# EAGLE board Soleful (EAGLE 7.7.0)

Size 100 x 80 mm. Coordinates in mm from the lower left corner, seen from the top.
Outline: 0,0 100,0 100,80 0,80 0,0
Copper layers (1*16): Top 0.035mm / dielectric 1.5mm / Bottom 0.035mm
Design rules "default": minimum track width 10mil, minimum drill 24mil, track to track 8mil, track to pad 8mil, pad to pad 8mil, via to via 8mil, smd to smd 8mil, copper to edge 40mil, drill to drill 8mil, minimum pad ring 10mil, minimum via ring 8mil, stop-mask expansion 4mil, vias tented up to drill 0mil, thermal gap 10mil

## Footprints (pad centres in the part's own frame; a part is rotated, then mirrored left to right if it is on the bottom)
0603 = smd 1.1 x 1: 1 -0.85,0; 2 0.85,0
0402-CAP = smd 0.7 x 0.9: 1 -0.65,0; 2 0.65,0
0805-NO = smd 1.3 x 1.5: 1 -0.95,0; 2 0.95,0
0805_10MGAP = smd 1.2 x 1.5: 1 -1.05,0; 2 1.05,0
LED-0603 = smd 1 x 1: A -0.877,0; C 0.877,0
LQFP64 = smd 0.24 x 1.2: 1 -3.75,-6; 2 -3.25,-6; 3 -2.75,-6; 4 -2.25,-6; 5 -1.75,-6; 6 -1.25,-6; 7 -0.75,-6; 8 -0.25,-6; 9 0.25,-6; 10 0.75,-6; 11 1.25,-6; 12 1.75,-6; 13 2.25,-6; 14 2.75,-6; 15 3.25,-6; 16 3.75,-6; 33 3.75,6; 34 3.25,6; 35 2.75,6; 36 2.25,6; 37 1.75,6; 38 1.25,6; 39 0.75,6; 40 0.25,6; 41 -0.25,6; 42 -0.75,6; 43 -1.25,6; 44 -1.75,6; 45 -2.25,6; 46 -2.75,6; 47 -3.25,6; 48 -3.75,6 | smd 1.2 x 0.24: 17 6,-3.75; 18 6,-3.25; 19 6,-2.75; 20 6,-2.25; 21 6,-1.75; 22 6,-1.25; 23 6,-0.75; 24 6,-0.25; 25 6,0.25; 26 6,0.75; 27 6,1.25; 28 6,1.75; 29 6,2.25; 30 6,2.75; 31 6,3.25; 32 6,3.75; 49 -6,3.75; 50 -6,3.25; 51 -6,2.75; 52 -6,2.25; 53 -6,1.75; 54 -6,1.25; 55 -6,0.75; 56 -6,0.25; 57 -6,-0.25; 58 -6,-0.75; 59 -6,-1.25; 60 -6,-1.75; 61 -6,-2.25; 62 -6,-2.75; 63 -6,-3.25; 64 -6,-3.75
SOT223 = smd 1.219 x 2.235: 1 -2.311,-3.099; 2 0,-3.099; 3 2.311,-3.099 | smd 3.6 x 2.2: 4 0,3.099
JST-2-SMD = smd 1 x 4.6: 1 -1,-3.7; 2 1,-3.7 | smd 1.6 x 3.4: NC1 -3.4,1.5; NC2 3.4,1.5
INDUCTOR_SDR1307 = smd 14 x 4.75: P$1 0,4.6; P$2 0,-4.6
LED3MM = drill 0.813: A -1.27,0; K 1.27,0
TXC-SMD-32X15 = smd 1 x 1.8: P$1 -1.25,0; P$2 1.25,0
R0603 = smd 1 x 1.1: 1 -0.85,0; 2 0.85,0
TACTILE_SWITCH_SMD_4.6X2.8MM = smd 0.9 x 1: 1 -2.05,-0.8; 2 2.05,-0.8; 3 2.05,0.8; 4 -2.05,0.8
SOT23-5 = smd 0.55 x 1.2: 1 -0.95,-1.3; 2 0,-1.3; 3 0.95,-1.3; 4 0.95,1.3; 5 -0.95,1.3
DFN10 = smd 0.3 x 0.825: P$1 1,1.24; P$2 0.5,1.24; P$3 0,1.24; P$4 -0.5,1.24; P$5 -1,1.24; P$6 -1,-1.24; P$7 -0.5,-1.24; P$8 0,-1.24; P$9 0.5,-1.24; P$10 1,-1.24
BNO055 = smd 0.25 x 0.475: 1 -2.25,1.562; 6 -2.25,-1.562; 7 -1.75,-1.562; 8 -1.25,-1.562; 9 -0.75,-1.562; 10 -0.25,-1.562; 11 0.25,-1.562; 12 0.75,-1.562; 13 1.25,-1.562; 14 1.75,-1.562; 15 2.25,-1.562; 20 2.25,1.562; 21 1.75,1.562; 22 1.25,1.562; 23 0.75,1.562; 24 0.25,1.562; 25 -0.25,1.562; 26 -0.75,1.562; 27 -1.25,1.562; 28 -1.75,1.562 | smd 0.375 x 0.25: 2 -2.312,0.75; 3 -2.312,0.25; 4 -2.312,-0.25; 5 -2.312,-0.75; 16 2.312,-0.75; 17 2.312,-0.25; 18 2.312,0.25; 19 2.312,0.75
MOLEX-SD-105027-PKG = smd 0.5 x 1: G$1 0.2,-6.66; P$1 3.85,-6.66; P$2 2.75,-6.66; P$3 1.65,-6.66; P$4 0.9,-6.66; P$5 -0.55,-6.66; P$6 -1.65,-6.66; P$7 -2.75,-6.66; P$8 -3.85,-6.66 | smd 1.05 x 1.2: M$1 5.225,-0.6; M$2 5.225,-5.05; M$3 -5.225,-0.6; M$4 -5.225,-5.05
ESP-12 = smd 2 x 1.2: 1 -7.5,4.5; 2 -7.5,2.5; 3 -7.5,0.5; 4 -7.5,-1.5; 5 -7.5,-3.5; 6 -7.5,-5.5; 7 -7.5,-7.5; 8 -7.5,-9.5; 9 7.5,-9.5; 10 7.5,-7.5; 11 7.5,-5.5; 12 7.5,-3.5; 13 7.5,-1.5; 14 7.5,0.5; 15 7.5,2.5; 16 7.5,4.5
FA-128 = smd 0.95 x 0.85: 1 -0.725,-0.575; 2 0.725,-0.575; 3 0.725,0.575; 4 -0.725,0.575
CRYSTAL_8X3.8 = smd 1.3 x 1.9: P$1 -2.75,-1.6; P$2 2.75,-1.6; P$3 2.75,1.6; P$4 -2.75,1.6
0402-RES = smd 0.7 x 0.9: 1 -0.65,0; 2 0.65,0

## Placement (x,y rotation side)
C1  10pF  [0603]  -33.02,55.88 0 top  (outside the outline)
C2  10pF  [0603]  -36.83,55.88 0 top  (outside the outline)
C3  100nF  [0603]  -40.64,55.88 0 top  (outside the outline)
C4  100nF  [0603]  -44.45,55.88 0 top  (outside the outline)
C5  100nF  [0603]  -48.26,55.88 0 top  (outside the outline)
C6  100nF  [0603]  -52.07,55.88 0 top  (outside the outline)
C7  4.7uF  [0603]  -55.88,55.88 0 top  (outside the outline)
C8  100nF  [0603]  -59.69,55.88 0 top  (outside the outline)
C9  100nF  [0603]  -63.5,55.88 0 top  (outside the outline)
C10  4.7uF  [0603]  -67.31,55.88 0 top  (outside the outline)
C11  2.2pF  [0603]  -71.12,55.88 0 top  (outside the outline)
C12  2.2pF  [0603]  -15.24,62.23 0 top  (outside the outline)
C13  100nF  [0603]  -19.05,62.23 0 top  (outside the outline)
C14  100nF  [0603]  -22.86,62.23 0 top  (outside the outline)
C15  100nF  [0603]  -26.67,62.23 0 top  (outside the outline)
C16  2.2uF  [0402-CAP]  -19.05,69.85 0 top  (outside the outline)
C17  4.7uF  [0603]  -30.48,62.23 0 top  (outside the outline)
C18  4.7uF  [0603]  -34.29,62.23 0 top  (outside the outline)
C19  2.2uF  [0402-CAP]  -22.86,69.85 0 top  (outside the outline)
C20  2.2uF  [0402-CAP]  -26.67,69.85 0 top  (outside the outline)
C21  22pF  [0805-NO]  -46.99,69.85 0 top  (outside the outline)
C22  22pF  [0805-NO]  -53.34,69.85 0 top  (outside the outline)
C23  0.1uF  [0805-NO]  -59.69,69.85 0 top  (outside the outline)
C24  0.1uF  [0805_10MGAP]  -40.64,69.85 0 top  (outside the outline)
C25  4.7uF  [0402-CAP]  -30.48,69.85 0 top  (outside the outline)
C26  4.7uF  [0402-CAP]  -34.29,69.85 0 top  (outside the outline)
D2  LED-RED  [LED-0603]  -15.24,69.85 0 top  (outside the outline)
D3  LED-GREEN  [LED-0603]  -60.96,66.04 0 top  (outside the outline)
D4  LED-YELLOW  [LED-0603]  -54.61,66.04 0 top  (outside the outline)
D5  LED-BLUE  [LED-0603]  -67.31,66.04 0 top  (outside the outline)
FRAME1  FRAME-LEDGER  [CREATIVE_COMMONS]  -101.6,39.37 0 top  (outside the outline)
IC1  STM32F405RGT  [LQFP64]  -53.34,7.62 0 top  (outside the outline)
IC2  MCP1703DB  [SOT223]  -43.18,33.02 0 top  (outside the outline)
J1  [JST-2-SMD]  -29.21,34.29 0 top  (outside the outline)
L1  27uH  [INDUCTOR_SDR1307]  -38.1,8.89 0 top  (outside the outline)
LED1  [LED3MM]  -24.13,57.15 0 top  (outside the outline)
Q4  32.768kHz  [TXC-SMD-32X15]  -50.8,73.66 0 top  (outside the outline)
R3  4.7k  [0603]  -38.1,62.23 0 top  (outside the outline)
R4  560  [R0603]  -53.34,49.53 0 top  (outside the outline)
R5  560  [R0603]  -58.42,49.53 0 top  (outside the outline)
R6  560  [R0603]  -63.5,49.53 0 top  (outside the outline)
R7  560  [R0603]  -68.58,49.53 0 top  (outside the outline)
R8  4.7k  [0603]  -41.91,62.23 0 top  (outside the outline)
R9  4.7k  [0603]  -45.72,62.23 0 top  (outside the outline)
R11  4.7k  [0603]  -49.53,62.23 0 top  (outside the outline)
R12  4.7k  [0603]  -53.34,62.23 0 top  (outside the outline)
R13  100k  [0603]  -57.15,62.23 0 top  (outside the outline)
R14  100k  [0603]  -60.96,62.23 0 top  (outside the outline)
R15  100k  [0603]  -64.77,62.23 0 top  (outside the outline)
R17  4.7k  [0603]  -68.58,62.23 0 top  (outside the outline)
R19  10K  [0805-NO]  -66.04,69.85 0 top  (outside the outline)
R20  100k  [0603]  -15.24,66.04 0 top  (outside the outline)
R21  100k  [0603]  -19.05,66.04 0 top  (outside the outline)
R22  10K  [0805-NO]  -17.78,73.66 0 top  (outside the outline)
R23  10K  [0805-NO]  -24.13,73.66 0 top  (outside the outline)
R24  10k  [0603]  -22.86,66.04 0 top  (outside the outline)
R25  10k  [0603]  -26.67,66.04 0 top  (outside the outline)
R26  10k  [0603]  -30.48,66.04 0 top  (outside the outline)
R27  10k  [0603]  -34.29,66.04 0 top  (outside the outline)
R28  10k  [0603]  -38.1,66.04 0 top  (outside the outline)
R29  10k  [0603]  -41.91,66.04 0 top  (outside the outline)
R30  10k  [0603]  -45.72,66.04 0 top  (outside the outline)
R31  470  [0603]  -49.53,66.04 0 top  (outside the outline)
SW1  RST  [TACTILE_SWITCH_SMD_4.6X2.8MM]  -40.64,49.53 0 top  (outside the outline)
SW2  USR  [TACTILE_SWITCH_SMD_4.6X2.8MM]  -46.99,49.53 0 top  (outside the outline)
U2  MCP73831  [SOT23-5]  -15.24,57.15 0 top  (outside the outline)
U$1  MMA7660  [DFN10]  -29.21,57.15 0 top  (outside the outline)
U$4  BNO055  [BNO055]  -25.4,50.8 0 top  (outside the outline)
U$9  MOLEX-SD-105027  [MOLEX-SD-105027-PKG]  -19.05,36.83 0 top  (outside the outline)
X1  [ESP-12]  -21.59,13.97 0 top  (outside the outline)
Y1  12 MHz  [FA-128]  -35.56,50.8 0 top  (outside the outline)
Y2  32.768kHz  [CRYSTAL_8X3.8]  -17.78,49.53 0 top  (outside the outline)
Z1  [0402-RES]  -27.94,73.66 0 top  (outside the outline)
Z2  [0402-RES]  -31.75,73.66 0 top  (outside the outline)
Z3  [0402-RES]  -35.56,73.66 0 top  (outside the outline)
Z4  [0402-RES]  -39.37,73.66 0 top  (outside the outline)
Z5  [0402-RES]  -43.18,73.66 0 top  (outside the outline)
Z6  [0402-RES]  -46.99,73.66 0 top  (outside the outline)

## Library data of the parts
C1 C2 = SparkFun-Capacitors; PROD_ID: CAP-11812
C3-C6 C8 C9 C11-C15 = SparkFun-Capacitors; PROD_ID: CAP-00867
C7 C10 C17 C18 C25 C26 = SparkFun-Capacitors; PROD_ID: CAP-08280
C16 C19 C20 = SparkFun-Retired; PROD_ID: CAP-07888
C21-C24 R19 R22 R23 U$4 Y2 = microbuilder
D2 = SparkFun-LED; PROD_ID: DIO-00819
D3 = SparkFun-LED; PROD_ID: DIO-00821
D4 = SparkFun-LED; PROD_ID: DIO-09003
D5 = SparkFun-LED; PROD_ID: DIO-08575
FRAME1 = SparkFun-Aesthetics
IC1 Q4 U$1 U$9 = pyboard
IC2 = linear
J1 = SparkFun-Connectors; PROD_ID: CONN-11443; SF_ID: PRT-08612
L1 = SparkFun-Coils; PROD_ID: NDUC-12529
LED1 = SparkFun
R3 R8 R9 R11 R12 R17 = SparkFun-Resistors; PROD_ID: RES-07857
R4-R7 = rcl
R13-R15 R20 R21 = SparkFun-Resistors; PROD_ID: RES-07828
R24-R30 = SparkFun-Resistors; PROD_ID: RES-00824
R31 = SparkFun-Resistors; PROD_ID: RES-07869
SW1 SW2 = SparkFun-Switches; PROD_ID: SWCH-13065
U2 = SparkFun-PowerIC; PROD_ID: IC-09995
X1 = adafruit
Y1 = crystal
Z1-Z6 = SparkFun-DiscreteSemi

## Nets
3V3: C3.1 C4.1 C5.1 C6.1 C7.1 C14.1 C17.1 C18.1 C24.2 IC1.19 IC1.32 IC1.48 IC1.64 IC2.3 L1.P$1 R3.2 R8.2 R9.2 R11.2 R12.2 R13.2 R21.2 U$1.P$9 U$4.3 U$4.28 U$9.P$4 X1.8
A3V3: C9.1 C10.1 IC1.13 L1.P$2
ADC-FSR1: IC1.8 R24.2 Z1.1
ADC-FSR2: IC1.9 R25.2 Z2.1
ADC-FSR3: IC1.10 R26.2 Z3.1
ADC-FSR4: IC1.11 R27.2 Z4.1
ADC-FSR5: IC1.24 R28.2 Z5.1
ADC-FSR6: IC1.25 R29.2 Z6.1
BOOT0-P1: IC1.60 R15.2
BOOT_LOAD-IMU: IC1.15 U$4.4
GND: C1.2 C2.2 C3.2 C4.2 C5.2 C6.2 C7.2 C8.2 C9.2 C10.2 C11.2 C12.2 C13.2 C14.2 C15.2 C16.2 C17.2 C18.2 C19.1 C20.1 C21.1 C22.1 C23.1 C24.1 C25.2 C26.2 D2.C D3.C D4.C D5.C IC1.12 IC1.18 IC1.63 J1.1 R14.1 R15.1 R19.2 R20.1 R22.2 R23.2 R24.1 R25.1 R26.1 R27.1 R28.1 R29.1 R30.1 SW1.4 SW2.1 U2.2 U$1.P$1 U$1.P$2 U$1.P$4 U$1.P$8 U$1.P$10 U$4.2 U$4.10 U$4.15 U$4.16 U$4.18 U$4.25 U$9.P$6 X1.9 Y1.2 Y1.4
I2CADDR_3V: R23.1 U$4.17
INT_3V: U$4.14
N1: C12.1 IC1.3 Q4.P$1
N2: C11.1 IC1.4 Q4.P$2
N3: C2.1 IC1.5 Y1.1
N4: C1.1 IC1.6 Y1.3
N$3: IC2.2
N$4: D3.A R6.2
N$5: D4.A R7.2
N$6: D5.A R5.2
N$7: D2.A R4.2
N$9: C25.1 J1.2 U2.3
N$10: R30.2 U2.5
N$14: C26.1 LED1.A U2.4
N$15: LED1.K R31.2
N$16: R31.1 U2.1
N$55: C21.2 U$4.27 Y2.P$4
N$56: C22.2 U$4.26 Y2.P$1
N$57: C23.2 U$4.9
PA2-X3: IC1.16
PA3-X4: IC1.17
PA4-X5: IC1.20
PA5-X6: IC1.21
PA6-X7: IC1.22
PA7-X8: IC1.23
PA8-SDIO_SW: IC1.41 U$9.G$1
PA9-VBUS: IC1.42
PA10-ID: IC1.43 R21.1
PA11-DM: IC1.44
PA12-DP: IC1.45
PA13-RED-P5: IC1.46 R4.1
PA14-GRN-P4: IC1.49 R6.1
PA15-YEL-P3: IC1.50 R7.1
PB0-Y11: IC1.26
PB1-Y12: IC1.27
PB2-BOOT1-MMA-INT: IC1.28 R14.2 U$1.P$5
PB3-SW-X17: IC1.55 R17.2
PB4-BLU-P2: IC1.56 R5.1
PB5-MMA_AVDD: C15.1 IC1.57 R20.2 U$1.P$3
PB6-SCL-X9: IC1.58 R9.1 U$1.P$6
PB7-SDA-X10: IC1.59 R8.1 U$1.P$7
PB8-Y3: IC1.61
PB9-Y4: IC1.62
PB12-Y5: IC1.33
PB13-Y6: IC1.34
PB14-Y7: IC1.35
PB15-Y8: IC1.36
PC6-Y1: IC1.37
PC7-Y2: IC1.38
PC8-SDIO_D0: IC1.39 U$9.P$7
PC9-SDIO_D1: IC1.40 U$9.P$8
PC10-SDIO_D2: IC1.51 U$9.P$1
PC11-SDIO_D3: IC1.52 R13.1 U$9.P$2
PC12-SDIO_CK: IC1.53 U$9.P$5
PC13-X18: IC1.2
PD2-SDIO_CMD: IC1.54 U$9.P$3
PS0_3V: R19.1 U$4.6
PS1_3V: R22.1 U$4.5
RST#: C13.1 IC1.7 R3.1 SW1.1
RST-IMU: IC1.14 U$4.11
SCL-IMU: IC1.29 R11.1 U$4.19
SDA-IMU: IC1.30 R12.1 U$4.20
USR-SW: R17.1 SW2.3
V+: C16.1 IC2.1
VBACKUP: C8.1 IC1.1
VCAP1: C19.2 IC1.31
VCAP2: C20.2 IC1.47
VCC: Z1.2 Z2.2 Z3.2 Z4.2 Z5.2 Z6.2

## Tracks (layer width: path | path; a pad name or v marks a point on that pad's centre or on a via)
3V3  (26 unrouted)
A3V3  (3 unrouted)
ADC-FSR1  (2 unrouted)
ADC-FSR2  (2 unrouted)
ADC-FSR3  (2 unrouted)
ADC-FSR4  (2 unrouted)
ADC-FSR5  (2 unrouted)
ADC-FSR6  (2 unrouted)
BOOT0-P1  (1 unrouted)
BOOT_LOAD-IMU  (1 unrouted)
GND  (64 unrouted)
I2CADDR_3V  (1 unrouted)
N1  (2 unrouted)
N2  (2 unrouted)
N3  (2 unrouted)
N4  (2 unrouted)
N$4  (1 unrouted)
N$5  (1 unrouted)
N$6  (1 unrouted)
N$7  (1 unrouted)
N$9  (2 unrouted)
N$10  (1 unrouted)
N$14  (2 unrouted)
N$15  (1 unrouted)
N$16  (1 unrouted)
N$55  (2 unrouted)
N$56  (2 unrouted)
N$57  (1 unrouted)
PA8-SDIO_SW  (1 unrouted)
PA10-ID  (1 unrouted)
PA13-RED-P5  (1 unrouted)
PA14-GRN-P4  (1 unrouted)
PA15-YEL-P3  (1 unrouted)
PB2-BOOT1-MMA-INT  (2 unrouted)
PB3-SW-X17  (1 unrouted)
PB4-BLU-P2  (1 unrouted)
PB5-MMA_AVDD  (3 unrouted)
PB6-SCL-X9  (2 unrouted)
PB7-SDA-X10  (2 unrouted)
PC8-SDIO_D0  (1 unrouted)
PC9-SDIO_D1  (1 unrouted)
PC10-SDIO_D2  (1 unrouted)
PC11-SDIO_D3  (2 unrouted)
PC12-SDIO_CK  (1 unrouted)
PD2-SDIO_CMD  (1 unrouted)
PS0_3V  (1 unrouted)
PS1_3V  (1 unrouted)
RST#  (3 unrouted)
RST-IMU  (1 unrouted)
SCL-IMU  (2 unrouted)
SDA-IMU  (2 unrouted)
USR-SW  (1 unrouted)
V+  (1 unrouted)
VBACKUP  (1 unrouted)
VCAP1  (1 unrouted)
VCAP2  (1 unrouted)
VCC  (5 unrouted)